# Altium PCB 701C Power Button.PcbDoc
Units mil, origin at the board's own origin, x right, y up, seen from the top; angles counter-clockwise.
Board outline 669.29 x 275.59 mil, 2 copper layers (Top Layer, Bottom Layer); 4 components, 4 nets, 16 pads, 4 vias.
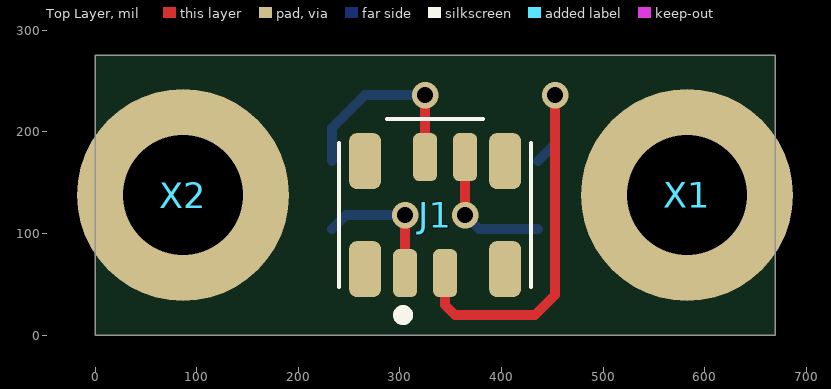
[diagram p0: Top Layer view]
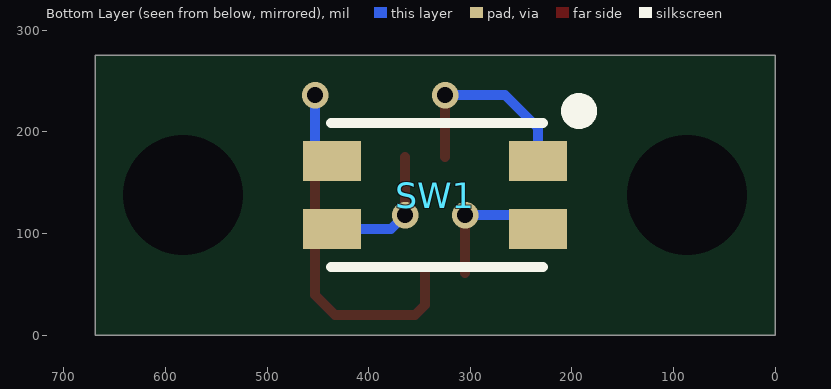
[diagram p1: Bottom Layer view, seen from below]

## Layer stack, top to bottom
Top Solder: solder mask 0.4, Solder Resist, Dk 3.5
Top Layer: signal copper 1.4
Dielectric 1: dielectric 12.6, FR-4, Dk 4.8
Bottom Layer: signal copper 1.4
Bottom Solder: solder mask 0.4, Solder Resist, Dk 3.5

## Board outline
0,0 669.29,0 669.29,275.59 0,275.59

## Design rules (kind name [scope] priority, off if disabled: settings)
Clearance [All] p1: gap=10 ignorepadtopadclearanceinfootprint=FALSE except(0: Arc-Hole Track-Hole SMDPad-Hole THPad-Hole Via-Hole Fill-Hole Poly-Hole Region-Hole Text-Hole)
PolygonConnect [All] p1: connectstyle=Relief reliefconductorwidth=10 reliefentries=4 polygonreliefangle="90 Angle" airgapwidth=10
RoomDefinition "701C Power Button" [InComponentClass('701C Power Button')] p1: confinementstyle=ConfineIn formatcopy=TRUE lockcomponents=FALSE outline -143.23,-90.04 1062.99,-90.04 1062.99,551.18 -143.23,551.18
RoutingVias [All] p1: holewidth=10 width=16 viastyle="Through Hole" minholewidth=10 minwidth=12 maxholewidth=16 maxwidth=26
SolderMaskExpansion [All] p1: expansion=4
Width [All] p1: maxlimit=10 minlimit=10 preferedwidth=10
30 further rules are at their usual default settings.

## Components (designator, comment, footprint, x,y, rotation, side; value= is the part's Value field where it differs from the comment)
J1 "5019510430" 5019510430 334.65,118.11 r0 top
SW1 "EVQ-P2B02x" EVQ-P2B02x 334.65,137.8 r270 bottom
X1 "9774020243R" 9774020243R 582.68,137.8 r0 top
X2 "9774020243R" 9774020243R 86.61,137.8 r0 top

## Footprints (in the part's own frame and the unit in brackets; to place one, negate y for a bottom-side part, rotate by r counter-clockwise, add the part's x,y. Pads: shape width x height; smd on the part's side, far side on the other; paste and mask are expansions set on the pad)
5019510430 [mm] "CONN FPC VERT 4POS .5MM R/A"
  rrect50% 0.6x1.2 smd: 1(-0.75,-1.45) 2(-0.25,1.45) 3(0.25,-1.45) 4(0.75,1.45)
  rrect50% 0.8x1.4 smd: 5(-1.75,-1.35) 5(-1.75,1.35) 5(1.75,-1.35) 5(1.75,1.35)
  silkscreen extent -2.4,-2.6 2.4,2.4, body extent -2.4,-1.85 2.4,2.28, height 4.33
9774020243R [mm] "ROUND STANDOFF M2X0.4 STEEL 2MM"
  round 5.3 smd paste-2.65: 1(0,0)
  round 0 hole 3 unplated: 78(0,0)
EVQ-P2B02x [mm] "SWITCH TACTILE SPST-NO 0.02A 15V"
  rect 1x1.45 smd: 1(-0.85,2.575) 2(0.85,2.575) 3(-0.85,-2.575) 4(0.85,-2.575)
  silkscreen extent -2.3,-2.6 1.8,3.8, body extent -1.73,-2.78 1.77,2.72, height 2.52

## Part data
J1: "4 Position FFC, FPC Connector Contacts, Vertical - 1 Sided 0.020\" (0.50mm) Surface Mount"
SW1: "SWITCH TACTILE SPST-NO 0.02A 15V"

## Via types
v1: diameter 26, hole 16, Top Layer to Bottom Layer, 4 vias

## Nets (pads, with @x,y where several pads share a name; then routed paths per layer and width w, separated by ;. In a path a pad name is that pad's centre, name@x,y a point inside that pad or via, vN(x,y) a via of type N, cw(c..) or ccw(c..) an arc to the next point about the centre after c; other vN are vias at no path point)
NetJ1_1: J1.1 SW1.2 | length 134.6
  Top Layer w10: J1.1 v1(305.12,118.11)
  Bottom Layer w10: SW1.2 247.05,118.11 v1(305.12,118.11)
NetJ1_2: J1.2 SW1.1 | length 198.5
  Top Layer w10: J1.2 v1(324.8,236.22)
  Bottom Layer w10: SW1.1 233.27,203.74 265.75,236.22 v1(324.8,236.22)
NetJ1_3: J1.3 SW1.3 | length 420.7
  Top Layer w10: J1.3 344.49,29.53 354.33,19.69 433.07,19.69 452.76,39.37 v1(452.76,236.22)
  Bottom Layer w10: SW1.3 452.76,187.99 v1(452.76,236.22)
NetJ1_4: J1.4 SW1.4 | length 134.6
  Top Layer w10: v1(364.17,118.11) J1.4
  Bottom Layer w10: v1(364.17,118.11) 377.95,104.33 SW1.4
pads on no net: J1.5 X1.1 X1.78 X2.1 X2.78

## Silkscreen, mask and mechanical layers (free items; w line width, h text height)
Mechanical 1:
  the board outline again, w3.94
Board Outline:
  the board outline again, w3.94

## Dimensions
669.29,275.59 to 669.29,0 on Mechanical 1
0,275.59 to 669.29,275.59 on Mechanical 1